# Altium PCB Unextended55.PcbDoc (part 2 of 2)
Units mm, origin at the board's own origin, x right, y up, seen from the top; angles counter-clockwise.
Board outline 275.2 x 94.2 mm, 2 copper layers (Component Side, Bottom Layer), stack 1.571 mm thick; 229 components, 125 nets, 706 pads, 180 vias.
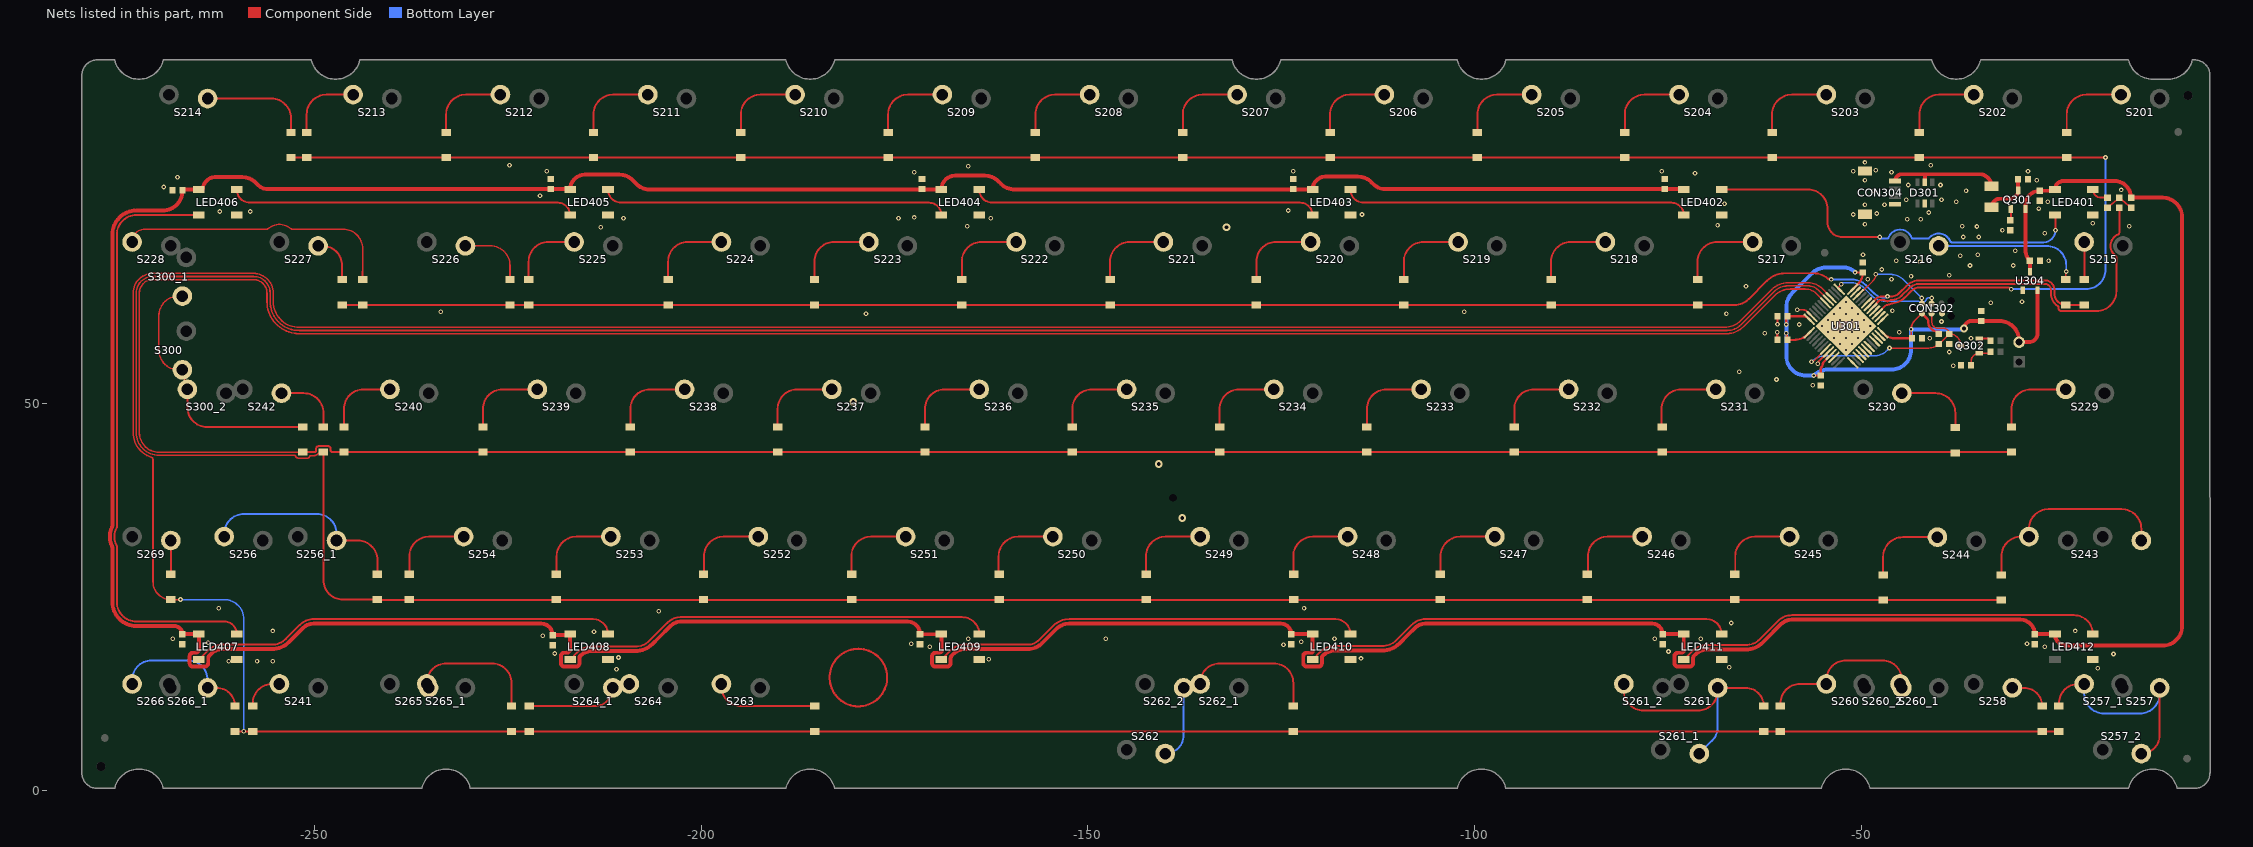
[diagram p2: the nets of this part, all layers, seen from the top]

## Via types
v1: diameter 0.6, hole 0.3, Component Side to Bottom Layer, tented both sides, 150 vias
v2: diameter 0.6, hole 0.3, Component Side to Bottom Layer, tented bottom, 25 vias
v3: diameter 1, hole 0.5, Component Side to Bottom Layer, tented both sides, 5 vias

## Nets (pads, with @x,y where several pads share a name; then routed paths per layer and width w, separated by ;. In a path a pad name is that pad's centre, name@x,y a point inside that pad or via, vN(x,y) a via of type N, cw(c..) or ccw(c..) an arc to the next point about the centre after c; other vN are vias at no path point) (continued)
GND: C301.1 C302.1 C303.1 C304.1 C305.1 C306.1 C307.1 C308.1 C310.2 C401.1 C402.1 C403.1 C404.1 C405.1 C406.1 C407.1 C408.1 C409.1 C410.1 C411.1 C412.1 CON302.5 CON304.4 CON304.5 D301.2 LED401.3 LED402.3 LED403.3 LED404.3 LED405.3 LED406.3 LED407.3 LED408.3 LED409.3 LED410.3 LED411.3 LED412.3 Q302.2 R304.2 R305.2 R307.2 U301.8 U301.23 U301.35 U301.47 U304.1 | length 44
  Component Side w0.254: v1(-58.293,62.103) -57.509,62.103 cw(c-57.509,61.49) -57.075,61.924 U301.47@-56.549,61.397 ; v1(-55.626,55.118) -55.56,55.184 -55.56,55.35 U301.8@-54.427,56.482 ; Q302.2@-34.741,58.389 -33.704,58.389 cw(c-33.705,58.135) -33.658,58.385 ccw(c-33.528,59.055) -33.528,58.372 R304.2@-33.289,58.074
  Component Side w0.279: -175.962,14.664 cw(c-179.68,14.54) -175.962,14.677
  Component Side w0.3: C305.1@-60.848,58.201 v1@-60.848,59.202 ; v1@-60.833,60.213 C304.1@-60.833,61.214
  Bottom Layer w0.254: v2(-55.081,60) v2(-54.303,59.222) v2(-53.526,58.444) v2(-52.748,57.666) v2(-51.97,56.889) ; v2(-52.748,62.333) v2(-51.192,60.778) v2(-49.637,59.222) ; v2(-51.97,63.111) v2(-51.192,62.333) v2(-50.414,61.556) v2(-49.637,60.778) v2(-48.859,60)
  other v1: -210.947,15.621 -19.431,15.748 -67.056,15.875 -261.112,16.637 -257.429,16.637 -255.397,16.637 -162.814,16.891 -114.681,17.018 -210.693,17.145 -17.392,17.597 -218.948,17.653 -74.93,17.907 -170.434,18.542 -26.289,18.542 -124.714,18.796 -172.847,18.923 -28.575,18.923 -263.779,19.05 -122.428,19.177 -268.351,19.558 -165.481,19.558 -147.701,19.558 -118.11,19.558 -76.708,19.558 -70.739,19.558 -220.472,19.939 -213.868,20.447 -255.397,20.574 -22.352,20.574 -66.802,21.59 -205.486,23.114 -262.382,23.495 -122.047,23.495 -56.261,52.324 -60.96,53.086 -65.786,54.102 -38.1,54.864 -38.608,56.642 -34.544,57.531 -41.148,58.42 -35.814,58.42 -62.484,59.055 -45.085,59.182 -60.848,59.194 -58.039,60.198 -60.833,60.221 -39.624,60.579 -178.689,61.595 -67.437,61.595 -233.68,61.864 -101.346,61.864 -45.974,61.976 -33.274,62.992 -29.21,63.119 -64.897,65.151 -49.149,66.04 -46.101,66.04 -43.561,66.421 -38.608,66.548 -47.371,67.31 -35.941,67.818 -30.353,67.818 -42.418,68.326 -45.466,68.453 -25.781,68.453 -37.211,69.088 -49.784,69.215 -34.925,69.215 -30.099,69.723 -36.83,71.501 -34.798,71.501 -26.289,72.009 -31.75,72.39 -212.979,72.771 -35.047,72.858 -165.608,72.898 -36.957,72.898 -15.367,72.898 -68.58,73.025 -49.53,73.152 -20.066,73.279 -44.069,73.787 -42.291,73.787 -210.058,73.914 -174.498,73.914 -162.56,73.914 -172.466,74.041 -114.554,74.422 -51.054,74.422 -48.006,74.549 -41.275,74.676 -262.255,74.803 -258.318,74.803 -124.079,74.93 -27.051,75.184 -49.53,75.692 -46.99,75.692 -117.094,75.819 -67.691,75.819 -37.719,76.073 -25.908,76.073 -44.196,76.327 -39.624,76.327 -220.853,76.835 -48.387,77.47 -36.449,77.47 -16.383,77.597 -269.494,77.978 -43.942,78.232 -39.751,78.232 -49.53,78.867 -27.305,78.867 -267.716,79.248 -71.501,79.756 -172.466,79.883 -46.101,79.883 -219.964,80.01 -123.444,80.01 -75.819,80.01 -51.054,80.01 -28.448,80.01 -48.133,80.137 -165.481,80.645 -224.79,80.772 -41.021,80.772 -49.53,81.153
  other v2: -51.192,57.666 -51.97,58.444 -50.414,58.444 -52.748,59.222 -51.192,59.222 -53.526,60 -51.97,60 -50.414,60 -54.303,60.778 -52.748,60.778 -53.526,61.556 -51.97,61.556
  other v3: -137.795,35.179 -140.843,42.164 -180.34,50.165 -132.08,72.771
LED: R308.2 U301.29 | length 48.6
  Component Side w0.254: U301.29@-48.452,62.457 -48.375,62.534 ccw(c-48.96,63.119) -48.267,62.667 cw(c-48.055,62.528) -48.236,62.706 -48.061,62.88 ccw(c-48.399,63.217) -47.988,62.976 cw(c-47.77,62.845) -47.95,63.024 -47.805,63.17 cw(c-47.319,62.686) -47.319,63.371 -47.132,63.371 cw(c-47.133,63.117) -46.983,63.322 ccw(c-46.609,63.825) -46.224,63.331 cw(c-46.069,63.13) -46.146,63.371 ccw(c-46.146,65.334) -46.143,63.371 ccw(c-46.146,65.334) -44.86,63.851 -44.848,63.862 ; -17.579,69.604 ccw(c-16.175,70.365) -17.121,69.078 ; R308.2@-16.637,75.296 -16.637,72.071 cw(c-16.891,72.072) -16.792,71.838 ccw(c-16.175,70.365) -17.121,69.078 cw(c-17.272,68.874) -17.018,68.875 -17.018,64.488 cw(c-19.558,64.488) -19.558,61.948 -23.558,61.948 -24.169,61.948 cw(c-24.169,62.275) -24.496,62.275 -24.496,62.379 ccw(c-24.75,62.378) -24.61,62.59 cw(c-23.558,64.19) -25.473,64.19 -25.473,64.643 ccw(c-26.289,64.643) -26.289,65.459 -42.382,65.459 ccw(c-42.382,63.373) -43.305,65.244 ccw(c-43.19,65.017) -43.345,65.218 -43.371,65.198 cw(c-43.526,65.399) -43.417,65.17 -43.507,65.127 ccw(c-43.398,64.898) -43.538,65.11 ccw(c-42.382,63.373) -43.858,64.847 -44.758,63.947 cw(c-46.146,65.334) -44.759,63.946 -44.802,63.902 cw(c-44.981,64.083) -44.815,63.891 -44.847,63.863 ; -44.847,63.863 ccw(c-44.681,63.671) -44.848,63.862
NetC306_2: C306.2 F301.1 Q301.3 | length 6.1
  Component Side w0.5: F301.1@-33.147,75.358 cw(c-32.051,75.358) -32.051,76.454 -30.791,76.454 ccw(c-30.791,77.527) Q301.3@-29.718,77.527 -29.718,78.994 C306.2@-29.733,78.994
NetC309_2: C309.2 Q302.1 R305.1 | length 3.8
  Component Side w0.203: R305.1@-35.799,54.899 -35.799,55.431 cw(c-34.741,55.431) Q302.1@-34.741,56.489 -33.477,56.489 ccw(c-33.477,56.677) C309.2@-33.289,56.677
NetD201_1: D201.1 S201.1 | length 10.8
  Component Side w0.254: D201.1@-23.431,85.05 -23.431,87.375 cw(c-20.892,87.375) -20.892,89.915 S201.1@-16.412,89.915
NetD202_1: D202.1 S202.1 | length 10.8
  Component Side w0.254: D202.1@-42.481,85.05 -42.481,87.375 cw(c-39.941,87.375) -39.941,89.915 S202.1@-35.462,89.915
NetD203_1: D203.1 S203.1 | length 10.8
  Component Side w0.254: D203.1@-61.531,85.05 -61.531,87.375 cw(c-58.991,87.375) -58.991,89.915 S203.1@-54.512,89.915
NetD204_1: D204.1 S204.1 | length 10.8
  Component Side w0.254: D204.1@-80.581,85.05 -80.581,87.375 cw(c-78.041,87.375) -78.041,89.915 S204.1@-73.562,89.915
NetD205_1: D205.1 S205.1 | length 10.8
  Component Side w0.254: D205.1@-99.632,85.05 -99.632,87.375 cw(c-97.091,87.375) -97.091,89.915 S205.1@-92.612,89.915
NetD206_1: D206.1 S206.1 | length 10.8
  Component Side w0.254: D206.1@-118.681,85.05 -118.681,87.375 cw(c-116.141,87.375) -116.141,89.915 S206.1@-111.662,89.915
NetD207_1: D207.1 S207.1 | length 10.8
  Component Side w0.254: D207.1@-137.731,85.05 -137.731,87.375 cw(c-135.191,87.375) -135.191,89.915 S207.1@-130.712,89.915
NetD208_1: D208.1 S208.1 | length 10.8
  Component Side w0.254: D208.1@-156.781,85.05 -156.781,87.375 cw(c-154.242,87.375) -154.242,89.915 S208.1@-149.762,89.915
NetD209_1: D209.1 S209.1 | length 10.8
  Component Side w0.254: D209.1@-175.832,85.05 -175.832,87.375 cw(c-173.291,87.375) -173.291,89.915 S209.1@-168.812,89.915
NetD210_1: D210.1 S210.1 | length 10.8
  Component Side w0.254: D210.1@-194.881,85.05 -194.881,87.375 cw(c-192.341,87.375) -192.341,89.915 S210.1@-187.862,89.915
NetD211_1: D211.1 S211.1 | length 10.8
  Component Side w0.254: D211.1@-213.931,85.05 -213.931,87.375 cw(c-211.391,87.375) -211.391,89.915 S211.1@-206.912,89.915
NetD212_1: D212.1 S212.1 | length 10.8
  Component Side w0.254: D212.1@-232.981,85.05 -232.981,87.375 cw(c-230.441,87.375) -230.441,89.915 S212.1@-225.962,89.915
NetD213_1: D213.1 S213.1 | length 9.8
  Component Side w0.254: D213.1@-251.016,85.05 -251.016,87.375 cw(c-248.475,87.375) -248.475,89.915 S213.1@-245.012,89.915
NetD214_1: D214.1 S214.1 | length 14.1
  Component Side w0.254: S214.1@-263.825,89.415 -255.587,89.415 cw(c-255.587,86.875) -253.047,86.875 D214.1@-253.047,85.05
NetD215_1: D215.1 S215.1 | length 4.9
  Component Side w0.254: S215.1@-21.175,70.865 cw(c-21.175,70.836) -21.145,70.836 D215.1@-21.145,66
NetD216_1: D216.1 S216.1 | length 19.8
  Component Side w0.254: D216.1@-23.558,66 -23.558,66.992 cw(c-23.495,66.992) v1(-23.495,67.056)
  Bottom Layer w0.254: S216.1@-39.987,70.365 -26.035,70.365 cw(c-26.035,67.825) -23.495,67.825 v1(-23.495,67.056)
NetD217_1: D217.1 S217.1 | length 10.9
  Component Side w0.254: D217.1@-71.162,66 -71.162,68.325 cw(c-68.622,68.325) -68.622,70.865 S217.1@-64.037,70.865
NetD218_1: D218.1 S218.1 | length 10.8
  Component Side w0.254: D218.1@-90.106,66 -90.106,68.325 cw(c-87.566,68.325) -87.566,70.865 S218.1@-83.087,70.865
NetD219_1: D219.1 S219.1 | length 10.8
  Component Side w0.254: D219.1@-109.156,66 -109.156,68.325 cw(c-106.617,68.325) -106.617,70.865 S219.1@-102.137,70.865
NetD220_1: D220.1 S220.1 | length 10.8
  Component Side w0.254: D220.1@-128.207,66 -128.207,68.325 cw(c-125.666,68.325) -125.666,70.865 S220.1@-121.187,70.865
NetD221_1: D221.1 S221.1 | length 10.7
  Component Side w0.254: D221.1@-147.13,66 -147.13,68.325 cw(c-144.589,68.325) -144.589,70.865 S221.1@-140.237,70.865
NetD222_1: D222.1 S222.1 | length 10.8
  Component Side w0.254: D222.1@-166.306,66 -166.306,68.325 cw(c-163.766,68.325) -163.766,70.865 S222.1@-159.287,70.865
NetD223_1: D223.1 S223.1 | length 10.8
  Component Side w0.254: D223.1@-185.356,66 -185.356,68.325 cw(c-182.816,68.325) -182.816,70.865 S223.1@-178.337,70.865
NetD224_1: D224.1 S224.1 | length 10.7
  Component Side w0.254: D224.1@-204.279,66 -204.279,68.325 cw(c-201.739,68.325) -201.739,70.865 S224.1@-197.387,70.865
NetD225_1: D225.1 S225.1 | length 9.7
  Component Side w0.254: D225.1@-222.314,66 -222.314,68.325 cw(c-219.773,68.325) -219.773,70.865 S225.1@-216.437,70.865
NetD226_1: D226.1 S226.1 | length 9
  Component Side w0.203: S226.1@-230.487,70.365 -227.266,70.365 cw(c-227.266,67.825) -224.726,67.825 D226.1@-224.726,66
NetD227_1: D227.1 S227.1 | length 5.8
  Component Side w0.254: S227.1@-248.983,70.365 cw(c-248.983,67.825) -246.444,67.825 D227.1@-246.444,66
NetD228_1: D228.1 S228.1 | length 36.5
  Component Side w0.203: S228.1@-273.587,70.865 cw(c-271.936,70.865) -271.936,72.517 -256.174,72.517 ccw(c-256.175,72.72) -256.042,72.567 cw(c-254.537,70.865) -253.033,72.567 ccw(c-252.9,72.72) -252.901,72.517 -246.316,72.517 cw(c-246.316,69.977) -243.776,69.977 -243.776,67.056
  Component Side w0.254: D228.1@-243.776,66 -243.776,67.056
NetD229_1: D229.1 S229.1 | length 10.8
  Component Side w0.254: D229.1@-30.575,46.95 -30.575,49.275 cw(c-28.035,49.275) -28.035,51.815 S229.1@-23.556,51.815
NetD230_1: D230.1 S230.1 | length 10.3
  Component Side w0.254: S230.1@-44.75,51.315 -40.386,51.315 cw(c-40.386,48.775) -37.846,48.775 D230.1@-37.846,46.847
NetD231_1: D231.1 S231.1 | length 10.8
  Component Side w0.254: D231.1@-75.819,46.95 -75.819,49.275 cw(c-73.279,49.275) -73.279,51.815 S231.1@-68.8,51.815
NetD232_1: D232.1 S232.1 | length 10.8
  Component Side w0.254: D232.1@-94.869,46.95 -94.869,49.275 cw(c-92.329,49.275) -92.329,51.815 S232.1@-87.85,51.815
NetD233_1: D233.1 S233.1 | length 10.8
  Component Side w0.254: D233.1@-113.919,46.95 -113.919,49.275 cw(c-111.379,49.275) -111.379,51.815 S233.1@-106.9,51.815
NetD234_1: D234.1 S234.1 | length 10.8
  Component Side w0.254: D234.1@-132.969,46.95 -132.969,49.275 cw(c-130.429,49.275) -130.429,51.815 S234.1@-125.95,51.815
NetD235_1: D235.1 S235.1 | length 10.8
  Component Side w0.254: D235.1@-152.019,46.95 -152.019,49.275 cw(c-149.479,49.275) -149.479,51.815 S235.1@-145,51.815
NetD236_1: D236.1 S236.1 | length 10.8
  Component Side w0.254: D236.1@-171.069,46.95 -171.069,49.275 cw(c-168.529,49.275) -168.529,51.815 S236.1@-164.05,51.815
NetD237_1: D237.1 S237.1 | length 10.8
  Component Side w0.254: D237.1@-190.119,46.95 -190.119,49.275 cw(c-187.579,49.275) -187.579,51.815 S237.1@-183.1,51.815
NetD238_1: D238.1 S238.1 | length 10.8
  Component Side w0.254: D238.1@-209.169,46.95 -209.169,49.275 cw(c-206.629,49.275) -206.629,51.815 S238.1@-202.15,51.815
NetD239_1: D239.1 S239.1 | length 10.8
  Component Side w0.254: D239.1@-228.219,46.95 -228.219,49.275 cw(c-225.679,49.275) -225.679,51.815 S239.1@-221.2,51.815
NetD240_1: D240.1 S240.1 | length 9.7
  Component Side w0.254: D240.1@-246.189,46.95 -246.189,49.275 cw(c-243.649,49.275) -243.649,51.815 S240.1@-240.25,51.815
NetD241_1: D241.1 S241.2 | length 5.2
  Component Side w0.254: D241.1@-258,10.85 -258,11.175 cw(c-255.46,11.175) -255.46,13.715 S241.2@-254.537,13.715
NetD242_1: D242.1 S242.1 | length 8.7
  Component Side w0.254: S242.1@-254.275,51.315 -251.397,51.315 cw(c-251.397,48.775) -248.856,48.775 D242.1@-248.856,46.95
NetD243_1: D243.1 S243.1 | length 27.4
  Component Side w0.254: D243.1@-31.877,27.829 -31.877,30.225 cw(c-29.337,30.225) -29.337,32.765 S243.1@-28.319,32.765 -28.319,33.782 cw(c-25.779,33.782) -25.779,36.322 -16.334,36.322 cw(c-16.334,33.782) -13.794,33.782 S243.1@-13.794,32.265
NetD244_1: D244.1 S244.2 | length 10.8
  Component Side w0.254: D244.1@-47.175,27.829 -47.175,30.154 cw(c-44.635,30.154) -44.635,32.694 S244.2@-40.156,32.694
NetD245_1: D245.1 S245.1 | length 10.8
  Component Side w0.254: D245.1@-66.294,27.9 -66.294,30.225 cw(c-63.754,30.225) -63.754,32.765 S245.1@-59.275,32.765
NetD246_1: D246.1 S246.1 | length 10.8
  Component Side w0.254: D246.1@-85.344,27.9 -85.344,30.225 cw(c-82.804,30.225) -82.804,32.765 S246.1@-78.325,32.765
NetD247_1: D247.1 S247.1 | length 10.8
  Component Side w0.254: D247.1@-104.394,27.9 -104.394,30.225 cw(c-101.854,30.225) -101.854,32.765 S247.1@-97.375,32.765
NetD248_1: D248.1 S248.1 | length 10.8
  Component Side w0.254: D248.1@-123.444,27.9 -123.444,30.225 cw(c-120.904,30.225) -120.904,32.765 S248.1@-116.425,32.765
NetD249_1: D249.1 S249.1 | length 10.8
  Component Side w0.254: D249.1@-142.494,27.9 -142.494,30.225 cw(c-139.954,30.225) -139.954,32.765 S249.1@-135.475,32.765
NetD250_1: D250.1 S250.1 | length 10.8
  Component Side w0.254: D250.1@-161.544,27.9 -161.544,30.225 cw(c-159.004,30.225) -159.004,32.765 S250.1@-154.525,32.765
NetD251_1: D251.1 S251.1 | length 10.8
  Component Side w0.254: D251.1@-180.594,27.9 -180.594,30.225 cw(c-178.054,30.225) -178.054,32.765 S251.1@-173.575,32.765
NetD252_1: D252.1 S252.1 | length 10.8
  Component Side w0.254: D252.1@-199.643,27.9 -199.643,30.225 cw(c-197.103,30.225) -197.103,32.765 S252.1@-192.624,32.765
NetD253_1: D253.1 S253.1 | length 10.8
  Component Side w0.254: D253.1@-218.694,27.9 -218.694,30.225 cw(c-216.154,30.225) -216.154,32.765 S253.1@-211.675,32.765
NetD254_1: D254.1 S254.1 | length 10.8
  Component Side w0.254: D254.1@-237.744,27.9 -237.744,30.225 cw(c-235.204,30.225) -235.204,32.765 S254.1@-230.725,32.765
NetD255_1: D255.1 S256.2 S256_1.2 | length 27.2
  Component Side w0.254: S256_1.2@-247.155,32.265 -244.411,32.265 cw(c-244.411,29.725) -241.871,29.725 D255.1@-241.871,27.9
  Bottom Layer w0.254: S256.2@-261.68,32.765 -261.68,33.147 cw(c-259.14,33.147) -259.14,35.687 -249.695,35.687 cw(c-249.695,33.147) -247.155,33.147 S256_1.2@-247.155,32.265
NetD256_1: D256.1 S269.1 | length 4.4
  Component Side w0.254: D256.1@-268.587,27.9 S269.1@-268.587,32.265
NetD257_1: D257.1 S257.2 S257_1.2 S257_2.2 | length 29.6
  Component Side w0.254: D257.1@-24.447,10.85 -24.447,11.175 cw(c-21.907,11.175) -21.907,13.715 S257_1.2@-21.175,13.715 ; S257_2.2@-13.794,4.715 ccw(c-13.794,7.096) -11.412,7.096 S257.2@-11.412,13.215
  Bottom Layer w0.254: S257_1.2@-21.175,13.715 -21.175,12.446 ccw(c-18.635,12.446) -18.635,9.906 -13.952,9.906 ccw(c-13.952,12.446) -11.412,12.446 S257.2@-11.412,13.215
NetD258_1: D258.1 S258.1 | length 5.2
  Component Side w0.254: S258.1@-30.462,13.215 -28.971,13.215 cw(c-28.971,10.85) D258.1@-26.607,10.85
NetD260_1: D260.1 S260.1 S260_1.1 S260_2.1 | length 21.9
  Component Side w0.254: D260.1@-60.452,10.85 -60.452,11.175 cw(c-57.912,11.175) -57.912,13.715 S260.1@-54.512,13.715 -54.512,14.224 cw(c-51.972,14.224) -51.972,16.764 -47.29,16.764 cw(c-47.29,14.224) -44.75,14.224 S260_2.1@-44.75,13.215
NetD261_1: D261.1 S261.1 S261_1.1 S261_2.1 | length 33
  Component Side w0.254: S261_2.1@-80.706,13.715 -80.706,12.827 ccw(c-78.166,12.827) -78.166,10.287 -71.102,10.287 ccw(c-71.102,12.827) -68.562,12.827 S261.1@-68.562,13.215 -64.976,13.215 cw(c-64.976,10.85) D261.1@-62.611,10.85
  Bottom Layer w0.254: S261_1.1@-70.944,4.715 -69.306,6.352 ccw(c-71.102,8.148) -68.562,8.148 S261.1@-68.562,13.215
NetD262_1: D262.1 S262.2 S262_1.2 S262_2.2 | length 27.9
  Component Side w0.254: S262_1.2@-135.475,13.715 -135.475,13.843 cw(c-132.935,13.843) -132.935,16.383 -125.984,16.383 cw(c-125.984,13.843) -123.444,13.843 D262.1@-123.444,10.85
  Bottom Layer w0.254: S262.2@-140,4.715 ccw(c-140,7.096) -137.619,7.096 S262_2.2@-137.619,13.215
NetD263_1: D263.1 S263.2 | length 13.9
  Component Side w0.254: S263.2@-197.387,13.715 -197.387,13.39 ccw(c-194.847,13.39) -194.847,10.85 D263.1@-185.293,10.85
NetD264_1: D264.1 S264.1 S264_1.1 | length 12.2
  Component Side w0.254: D264.1@-222.25,10.85 -213.802,10.85 ccw(c-213.802,13.215) S264_1.1@-211.437,13.215
NetD265_1: D265.1 S265.2 S265_1.2 | length 17
  Component Side w0.254: S265_1.2@-235.487,13.715 -235.487,13.843 cw(c-232.947,13.843) -232.947,16.383 -227.076,16.383 cw(c-227.076,13.843) -224.536,13.843 D265.1@-224.536,10.85
NetD266_1: D266.1 S266.1 S266_1.1 | length 19.1
  Component Side w0.254: S266_1.1@-263.825,13.215 -262.651,13.215 cw(c-262.651,10.85) D266.1@-260.286,10.85
  Bottom Layer w0.254: S266.1@-273.587,13.715 -273.587,14.224 cw(c-271.047,14.224) -271.047,16.764 -266.365,16.764 cw(c-266.365,14.224) -263.825,14.224 S266_1.1@-263.825,13.215
NetD300_1: D300.1 S300.1 S300_1.1 S300_2.1 | length 34.7
  Component Side w0.203: S300.1@-267.589,54.34 cw(c-267.589,56.88) -270.129,56.88 -270.129,61.325 cw(c-267.589,61.325) S300_1.1@-267.589,63.865 ; S300.1@-267.087,54.34 S300_2.1@-266.444,51.815
  Component Side w0.254: S300_2.1@-266.444,51.815 -266.444,49.49 ccw(c-263.904,49.49) -263.904,46.95 D300.1@-251.523,46.95
  Bottom Layer w0.203: S300.1@-267.589,54.34 S300.1@-267.087,54.34 ; S300_1.1@-267.589,63.865 S300_1.1@-267.087,63.865
NetLED401_2: LED401.2 LED402.4 | length 52.2
  Component Side w0.254: LED402.4@-68.049,77.65 -56.896,77.65 cw(c-56.896,75.11) -54.356,75.11 -54.356,73.403 ccw(c-52.454,73.403) -52.454,71.501 v1(-47.625,71.501) ; v1@-24.95,72.448 ccw(c-24.892,72.448) v1(-24.892,72.39) -24.892,74.293 ccw(c-24.95,74.293) LED401.2@-24.95,74.35
  Bottom Layer w0.254: v1(-47.625,71.501) -47.625,71.295 ccw(c-47.601,71.548) -47.602,71.294 -46.707,71.294 ccw(c-46.708,71.548) -46.472,71.453 cw(c-44.987,70.865) -43.501,71.45 ccw(c-43.266,71.544) -43.307,71.294 -41.41,71.294 ccw(c-41.411,71.548) -41.217,71.385 ; -41.216,71.385 cw(c-39.987,70.365) -40.805,71.737 cw(c-39.987,70.365) -38.511,70.975 ccw(c-38.277,71.073) -38.278,70.819 -26.463,70.819 ccw(c-26.463,72.39) v1(-24.892,72.39)
NetLED401_4: LED401.4 R401.2 | length 2.5
  Component Side w0.254: LED401.4@-20.05,77.65 ccw(c-18.995,77.65) -18.995,76.596 R401.2@-18.161,76.596
NetLED402_2: LED402.2 LED403.4 | length 45
  Component Side w0.254: LED403.4@-116.049,77.65 ccw(c-114.345,77.65) -114.345,75.946 -74.545,75.946 cw(c-74.545,74.35) LED402.2@-72.949,74.35
NetLED403_2: LED403.2 LED404.4 | length 45
  Component Side w0.254: LED404.4@-164.049,77.65 ccw(c-162.345,77.65) -162.345,75.946 -122.545,75.946 cw(c-122.545,74.35) LED403.2@-120.949,74.35
NetLED404_2: LED404.2 LED405.4 | length 45
  Component Side w0.254: LED405.4@-212.049,77.65 ccw(c-210.346,77.65) -210.346,75.946 -170.545,75.946 cw(c-170.545,74.35) LED404.2@-168.949,74.35
NetLED405_2: LED405.2 LED406.4 | length 45
  Component Side w0.254: LED406.4@-260.049,77.65 ccw(c-258.345,77.65) -258.345,75.946 -218.545,75.946 cw(c-218.545,74.35) LED405.2@-216.95,74.35
NetLED406_2: LED406.2 LED407.4 | length 78.1
  Component Side w0.254: LED406.2@-264.45,74.35 LED406.2@-264.949,74.35 -273.029,74.35 ccw(c-273.029,71.81) -275.569,71.81 -275.569,33.993 cw(c-275.823,33.995) -275.6,33.873 ccw(c-273.587,32.765) -275.6,31.657 cw(c-275.823,31.535) -275.569,31.537 -275.569,24.328 ccw(c-273.029,24.328) -273.029,21.788 -261.687,21.788 cw(c-261.687,20.15) LED407.4@-260.049,20.15
NetLED407_2: LED407.2 LED408.4 | length 55.9
  Component Side w0.254: LED407.2@-264.949,16.85 -263.747,18.052 cw(c-261.951,16.256) -261.951,18.796 -255.51,18.796 ccw(c-255.51,21.336) -253.714,19.54 -251.899,21.354 cw(c-250.103,19.558) -250.103,22.098 -213.997,22.098 cw(c-213.997,20.15) LED408.4@-212.049,20.15
NetLED408_2: LED408.2 LED409.4 | length 56.1
  Component Side w0.254: LED408.2@-216.95,16.85 -216.005,17.795 cw(c-214.209,15.999) -214.209,18.539 -212.219,18.539 cw(c-212.076,15.548) -212.076,18.542 -208.52,18.542 ccw(c-208.52,21.082) -206.724,19.286 -204.401,21.608 ; -204.401,21.609 cw(c-204.223,21.427) -204.375,21.631 -203.985,21.922 ; -203.985,21.922 cw(c-202.692,20.193) -202.692,22.352 -166.251,22.352 cw(c-166.251,20.15) LED409.4@-164.049,20.15
NetLED409_2: LED409.2 LED410.4 | length 55.9
  Component Side w0.254: LED409.2@-168.949,16.85 -167.747,18.052 cw(c-165.951,16.256) -165.951,18.796 -157.793,18.796 ccw(c-157.793,20.882) -156.953,18.973 ccw(c-157.793,20.882) -156.319,19.406 -155.648,20.077 -154.504,21.22 cw(c-152.386,19.104) -154.053,21.591 cw(c-152.386,19.104) -152.386,22.098 -117.997,22.098 cw(c-117.997,20.15) LED410.4@-116.049,20.15
NetLED410_2: LED410.2 LED411.4 | length 55.9
  Component Side w0.254: LED410.2@-120.949,16.85 -119.93,17.869 cw(c-118.134,16.073) -118.134,18.613 -111.929,18.613 ccw(c-111.929,21.153) -110.133,19.357 -108.135,21.354 cw(c-106.339,19.558) -106.339,22.098 -69.997,22.098 cw(c-69.997,20.15) LED411.4@-68.049,20.15
NetLED411_2: LED411.2 LED412.4 | length 56.4
  Component Side w0.254: LED411.2@-72.949,16.85 -71.803,17.996 cw(c-70.007,16.2) -70.007,18.74 -64.939,18.74 ccw(c-64.939,21.28) -63.143,19.484 -60.764,21.862 cw(c-58.968,20.066) -58.968,22.606 -22.505,22.606 cw(c-22.505,20.15) LED412.4@-20.05,20.15
NetQ301_1: Q301.1 R307.1 | length 1.5
  Component Side w0.254: R307.1@-30.734,73.675 ccw(c-30.893,73.834) -30.668,73.834 Q301.1@-30.668,75.127
NetR306_2: R306.2 R308.1 R401.1 | length 4
  Component Side w0.254: R401.1@-18.161,75.296 -17.863,75.569 -16.935,76.323 R308.1@-16.637,76.596 -16.339,76.323 -15.411,75.569 R306.2@-15.113,75.296
NRST: C310.1 CON302.3 Q302.3 R303.2 U301.7 | length 27.9
  Component Side w0.203: v1(-56.434,55.394) ccw(c-56.434,55.906) -56.312,55.409 ccw(c-56.434,55.906) -56.072,55.544 U301.7@-54.781,56.836 ; v1(-46.355,57.15) -41.28,57.15 ccw(c-41.28,58.953) R303.2@-40.005,57.678 ccw(c-40.005,57.912) -39.839,57.747 C310.1@-38.608,58.978 ; CON302.3@-40.894,61.63 -40.894,60.579 ccw(c-40.005,60.579) -40.005,59.69 -39.32,59.69 cw(c-39.32,58.978) C310.1@-38.608,58.978 ; Q302.3@-37.141,57.439 -37.141,57.511 ccw(c-38.608,57.511) C310.1@-38.608,58.978
  Bottom Layer w0.203: v1(-56.434,55.394) cw(c-54.648,53.608) -54.648,56.134 -48.423,56.134 ccw(c-48.423,58.674) -46.627,56.878 v1(-46.355,57.15)
PA0: U301.10
PA3: U301.13
PA5: U301.15
PA6: U301.16
PA7: U301.17
PA9: D215.2 D216.2 D217.2 D218.2 D219.2 D220.2 D221.2 D222.2 D223.2 D224.2 D225.2 D226.2 D227.2 D228.2 U301.30 | length 233.6
  Component Side w0.254: D227.2@-246.444,62.73 D228.2@-243.776,62.73 -66.364,62.73 ccw(c-66.364,65.27) -64.568,63.474 -62.206,65.836 cw(c-59.821,63.452) -62.204,65.837 cw(c-59.821,63.452) -60.314,66.787 ccw(c-60.35,67.039) -60.309,66.788 cw(c-59.886,64.284) -59.886,66.824 -56.198,66.824 cw(c-56.198,63.944) -54.331,66.136 cw(c-56.198,63.944) -54.263,66.076 ccw(c-54.093,66.265) -54.053,66.014 -53.91,66.037 cw(c-53.87,65.786) -53.87,66.04 v1@-53.848,66.04 ; U301.30@-48.806,62.811 -48.125,63.492 cw(c-47.319,62.686) -47.319,63.825 v1(-46.609,63.825) -46.146,63.825 ccw(c-46.146,65.334) -45.08,64.267 -44.178,65.169 cw(c-42.382,63.373) -42.382,65.913 -26.289,65.913 cw(c-26.289,64.643) -25.019,64.643 -25.019,64.19 ccw(c-23.558,64.19) D216.2@-23.558,62.73 ; D216.2@-24.058,62.977 ccw(c-23.804,62.984) -24.057,62.967 -24.042,62.967 D216.2@-23.558,62.73 ; D215.2@-21.145,62.73 D216.2@-23.558,62.73
  Bottom Layer w0.254: v1(-53.877,66.024) -52.697,66.024 ccw(c-52.698,66.278) -52.664,66.026 cw(c-52.578,65.405) -52.492,66.026 ccw(c-52.458,66.278) -52.459,66.024 -51.201,66.024 cw(c-51.201,63.484) -49.405,65.28 cw(c-51.201,63.484) -49.401,65.276 -48.708,64.583 cw(c-49.008,64.277) -48.704,64.579 -48.395,64.27 ccw(c-46.903,65.764) -48.339,64.216 ccw(c-46.903,65.764) -46.895,63.652 ccw(c-46.896,63.906) -46.769,63.686 ccw(c-46.99,64.068) -46.678,63.756 v1(-46.609,63.825)
PA10: U301.31
PB0: U301.18
PB1: U301.19
PB4: D241.2 D256.2 D257.2 D258.2 D260.2 D261.2 D262.2 D263.2 D264.2 D265.2 D266.2 U301.40 | length 532.9
  Component Side w0.203: -272.416,43.795 ccw(c-270.11,46.22) -271.122,43.03 ; v1(-267.335,24.63) D256.2@-268.587,24.63 cw(c-268.587,26.934) -270.891,26.934 -270.891,42.791 ccw(c-271.094,42.791) -271.01,42.976 -271.09,43.012 cw(c-271.006,43.197) -271.122,43.03 ; U301.40@-54.074,63.871 -55.047,64.845 ccw(c-56.843,63.049) -56.843,65.589 -59.487,65.589 ccw(c-59.487,62.645) -61.568,64.727 -65.611,60.684 cw(c-67.691,62.766) -67.691,59.823 -251.997,59.823 cw(c-251.997,63.17) -255.324,62.803 cw(c-251.997,63.17) -255.344,63.17 -255.344,64.262 ccw(c-257.884,64.262) -257.884,66.802 -270.916,66.802 ccw(c-270.916,64.262) -273.456,64.262 -273.456,46.22 ccw(c-270.11,46.22) -271.398,43.131 ccw(c-270.11,46.22) -271.122,43.03
  Component Side w0.254: D266.2@-260.286,7.58 v1(-259.144,7.58) D241.2@-258,7.58 -225.044,7.58 -219.583,7.58 -205.486,7.58 -200.533,7.58 -175.451,7.58 -161.544,7.58 -157.734,7.58 D262.2@-123.444,7.58 -99.695,7.58 D261.2@-62.611,7.58 D260.2@-60.452,7.58 D258.2@-26.607,7.58 D257.2@-24.447,7.58
  Bottom Layer w0.203: v1(-267.335,24.63) -261.683,24.63 cw(c-261.683,22.09) -259.144,22.09 v1(-259.144,7.58)
PB5: D242.2 D243.2 D244.2 D245.2 D246.2 D247.2 D248.2 D249.2 D250.2 D251.2 D252.2 D253.2 D254.2 D255.2 U301.41 | length 506.4
  Component Side w0.203: D242.2@-248.856,43.68 -249.365,43.567 ccw(c-249.365,43.364) -249.508,43.508 -249.557,43.459 cw(c-250.048,43.934) -250.048,43.251 -250.442,43.251 ccw(c-250.441,43.048) -250.631,43.12 cw(c-250.913,43.225) -250.913,42.923 -252.134,42.923 cw(c-252.134,43.225) -252.421,43.135 ccw(c-252.615,43.074) -252.614,43.277 -270.11,43.277 cw(c-270.11,46.22) -273.053,46.22 -273.053,64.262 cw(c-270.916,64.262) -270.916,66.399 -257.884,66.399 cw(c-257.884,64.262) -256.45,65.846 cw(c-257.884,64.262) -255.747,64.262 -255.747,63.17 ccw(c-251.997,63.17) -251.997,59.42 -67.357,59.42 ccw(c-67.357,61.96) -65.561,60.164 -61.283,64.441 cw(c-59.487,62.645) -59.487,65.185 -56.9,65.185 cw(c-56.9,63.242) -55.526,64.617 U301.41@-54.427,63.518
  Component Side w0.254: D242.2@-248.856,43.68 -248.856,27.17 ccw(c-246.316,27.17) -246.316,24.63 D255.2@-241.871,24.63 ccw(c-241.8,24.63) -241.8,24.559 D244.2@-47.175,24.559 D243.2@-31.877,24.559
PB6: D229.2 D230.2 D231.2 D232.2 D233.2 D234.2 D235.2 D236.2 D237.2 D238.2 D239.2 D240.2 D300.2 U301.42 | length 488.7
  Component Side w0.203: D300.2@-251.523,43.68 -270.11,43.68 cw(c-270.11,46.22) -272.65,46.22 -272.65,64.262 cw(c-270.916,64.262) -270.916,65.996 -257.884,65.996 cw(c-257.884,64.262) -256.489,65.291 cw(c-256.653,65.171) -256.463,65.243 -256.437,65.174 ccw(c-256.247,65.246) -256.39,65.102 -256.365,65.077 cw(c-256.509,64.933) -256.327,65.024 cw(c-257.884,64.262) -256.15,64.262 -256.15,63.17 ccw(c-251.997,63.17) -252.634,59.066 cw(c-252.664,58.865) -252.622,59.064 ccw(c-252.184,61.087) -252.184,59.017 -67.357,59.017 ccw(c-67.357,61.96) -65.277,59.878 -61.234,63.921 cw(c-59.153,61.839) -59.153,64.782 -57.223,64.782 cw(c-57.223,62.792) -55.816,64.2 U301.42@-54.781,63.164
  Component Side w0.254: D300.2@-251.523,43.68 -250.048,43.68 ccw(c-250.048,43.934) -249.794,43.934 -249.794,44.135 cw(c-249.467,44.135) -249.467,44.462 -248.246,44.462 cw(c-248.246,44.135) -247.919,44.135 -247.919,43.934 ccw(c-247.665,43.934) -247.665,43.68 D240.2@-246.189,43.68 D239.2@-228.219,43.68 D238.2@-209.169,43.68 D237.2@-190.119,43.68 D236.2@-171.069,43.68 D235.2@-152.019,43.68 D234.2@-132.969,43.68 D233.2@-113.919,43.68 D232.2@-94.869,43.68 D231.2@-75.755,43.68 -70.993,43.68 -56.388,43.68 D229.2@-30.575,43.68
PB10: U301.21
PB11: U301.22
PB12: U301.25
PB13: U301.26
PB14: D201.2 D202.2 D203.2 D204.2 D205.2 D206.2 D207.2 D208.2 D209.2 D210.2 D211.2 D212.2 D213.2 D214.2 U301.27 | length 281.1
  Component Side w0.254: D214.2@-253.047,81.78 D213.2@-251.016,81.78 D212.2@-232.981,81.78 D211.2@-213.931,81.78 D210.2@-194.881,81.78 D209.2@-175.832,81.78 D208.2@-156.781,81.78 D207.2@-137.731,81.78 D206.2@-118.681,81.78 D205.2@-99.632,81.78 D204.2@-80.581,81.78 D203.2@-61.531,81.78 D202.2@-42.481,81.78 D201.2@-23.431,81.78 v1(-18.415,81.78) ; U301.27@-47.745,61.75 -46.967,62.528 cw(c-45.847,61.408) -46.766,62.698 cw(c-46.62,62.49) -46.619,62.744 ccw(c-46.609,63.825) -46.076,62.885 cw(c-45.952,62.663) -45.953,62.917 ; -46.017,62.921 ccw(c-46.146,65.334) -44.562,63.509 ; -44.562,63.509 cw(c-44.392,63.32) -44.558,63.512 -44.55,63.52 ccw(c-44.847,63.863) -44.549,63.521 -44.518,63.547 ccw(c-44.981,64.083) -44.481,63.582 -44.403,63.66 -43.538,64.525 cw(c-42.382,63.373) -43.315,64.712 cw(c-43.17,64.503) -43.314,64.713 cw(c-43.17,64.503) -43.279,64.733 -43.267,64.738 -43.22,64.761 ccw(c-43.526,65.399) -43.103,64.831 cw(c-42.952,64.627) -43.059,64.858 cw(c-42.382,63.373) -42.382,65.005 -31.174,65.005 cw(c-31.174,64.203) v1(-30.607,64.77)
  Bottom Layer w0.254: v1(-30.607,64.77) -20.955,64.77 ccw(c-20.955,67.31) -18.415,67.31 v1(-18.415,81.78)
PB15: U301.28
RAW: CON304.1 D301.5 F301.2 | length 14.9
  Component Side w0.5: CON304.1@-45.625,78.75 cw(c-44.746,78.75) -44.746,79.629 -41.783,79.629 ; D301.5@-41.783,78.591 -41.783,79.629 ; F301.2@-33.147,78.058 ccw(c-34.718,78.058) -34.718,79.629 -41.783,79.629
SWCLK: CON302.4 U301.37 | length 14.1
  Component Side w0.203: U301.37@-53.013,64.932 -52.605,65.34 ccw(c-52.67,65.405) v1(-52.578,65.405) ; CON302.4@-40.894,62.9 v1(-40.894,63.627)
  Bottom Layer w0.203: v1@-52.451,65.532 cw(c-52.298,65.379) -52.298,65.595 -51.201,65.595 cw(c-51.201,63.484) -49.708,64.977 cw(c-51.201,63.484) -49.705,64.974 -49.009,64.278 cw(c-49.152,64.133) -49.008,64.277 -48.699,63.968 ccw(c-46.903,65.764) -46.903,63.224 -42.692,63.224 cw(c-42.693,63.021) -42.56,63.174 ccw(c-42.164,63.627) -41.582,63.474 cw(c-41.386,63.421) -41.419,63.621 cw(c-41.349,63.193) -41.349,63.627 v1(-40.894,63.627)
SWDIO: CON302.2 U301.34 | length 11.2
  Component Side w0.203: U301.34@-50.22,64.225 ccw(c-50.236,64.428) -50.093,64.283 -49.779,64.598 cw(c-49.46,64.278) -49.635,64.694 ccw(c-49.715,64.881) -49.6,64.713 -48.483,65.831 ccw(c-49.327,66.675) v1(-48.133,66.675) ; CON302.2@-42.164,62.9 v1(-42.164,63.627)
  Bottom Layer w0.203: v1(-48.133,66.675) -46.264,66.675 cw(c-46.264,64.135) -44.468,65.931 v1(-42.164,63.627)
VCC: C307.2 C401.2 C402.2 C403.2 C404.2 C405.2 C406.2 C407.2 C408.2 C409.2 C410.2 C411.2 C412.2 LED401.1 LED402.1 LED403.1 LED404.1 LED405.1 LED406.1 LED407.1 LED408.1 LED409.1 LED410.1 LED411.1 LED412.1 Q301.2 R306.1 U304.3 | length 667.5
  Component Side w0.5: LED406.1@-264.949,77.65 -264.949,77.653 -267.086,77.653 -267.086,77.467 cw(c-269.626,77.467) -269.626,74.927 -273.029,74.927 ccw(c-273.029,71.81) -276.146,71.81 -276.146,34.189 cw(c-276.646,34.19) -276.192,33.981 ccw(c-273.587,32.765) -276.192,31.55 cw(c-276.646,31.34) -276.146,31.341 -276.146,24.328 ccw(c-273.029,24.328) -273.029,21.211 -268.146,21.211 cw(c-268.146,20.152) C407.2@-267.086,20.152 -264.949,20.152 LED407.1@-264.949,20.15 -264.949,18.25 cw(c-265.449,18.25) -265.449,17.75 -265.699,17.75 ccw(c-265.699,17.3) -266.149,17.3 -266.149,16.4 ccw(c-265.699,16.4) -265.699,15.95 -264.199,15.95 ccw(c-264.199,16.4) -263.749,16.4 -263.749,17.027 cw(c-263.249,17.027) -263.745,17.091 cw(c-263.249,17.027) -263.612,17.371 cw(c-263.249,17.027) -263.603,17.38 -263.34,17.643 cw(c-261.951,16.256) -262.515,18.136 cw(c-261.951,16.256) -261.951,18.219 -255.51,18.219 ccw(c-255.51,21.336) -253.304,19.133 -251.491,20.946 cw(c-250.103,19.558) -250.103,21.521 -220.704,21.521 cw(c-220.704,20.025) C408.2@-219.207,20.025 -217.075,20.025 ccw(c-217.075,20.15) LED408.1@-216.95,20.15 -216.95,18.25 cw(c-217.449,18.25) -217.449,17.75 -217.7,17.75 ccw(c-217.7,17.3) -218.15,17.3 -218.15,16.4 ccw(c-217.7,16.4) -217.7,15.95 -216.199,15.95 ccw(c-216.199,16.4) -215.749,16.4 -215.749,17.027 cw(c-215.25,17.027) -215.603,17.381 -215.596,17.387 cw(c-214.209,15.999) -214.209,17.962 -212.219,17.962 ccw(c-212.219,18.539) -212.193,17.962 cw(c-212.076,15.548) -212.076,17.965 -208.52,17.965 ccw(c-208.52,21.082) -206.316,18.878 -205.497,19.696 -204.036,21.157 cw(c-203.683,20.804) -203.982,21.204 -203.639,21.461 cw(c-202.692,20.193) -202.692,21.775 -173.333,21.775 cw(c-173.333,20.152) C409.2@-171.709,20.152 ; LED406.1@-264.5,77.7 cw(c-264.5,77.65) -264.45,77.65 cw(c-262.852,77.65) -262.852,79.248 -259.37,79.248 cw(c-259.37,76.708) -257.574,78.504 -257.302,78.232 ccw(c-256.018,79.516) -256.018,77.7 LED405.1@-216.95,77.7 ; LED405.1@-216.95,77.65 cw(c-215.026,77.65) -215.212,79.564 cw(c-215.188,79.311) -215.176,79.565 ccw(c-215.138,80.391) -215.032,79.571 cw(c-214.999,79.319) -214.998,79.573 -210.608,79.573 cw(c-210.608,77.033) -208.993,78.994 cw(c-210.608,77.033) -208.812,78.829 -208.285,78.303 ccw(c-206.709,79.879) -206.709,77.65 -170.45,77.65 ; C409.2@-171.709,20.15 LED409.1@-168.949,20.15 -168.949,17.927 -168.95,17.926 cw(c-169.331,18.25) -169.331,17.75 -169.7,17.75 ccw(c-169.7,17.3) -170.149,17.3 -170.149,16.4 ccw(c-169.7,16.4) -169.7,15.95 -168.199,15.95 ccw(c-168.199,16.4) -167.749,16.4 -167.749,17.027 cw(c-167.25,17.027) -167.603,17.38 -167.55,17.434 -167.34,17.643 cw(c-165.951,16.256) -167.339,17.644 cw(c-165.951,16.256) -165.951,18.219 -157.793,18.219 ccw(c-157.793,20.882) -155.912,18.997 ; C404.2@-171.709,77.653 LED404.1@-168.949,77.653 ; LED404.1@-168.949,77.65 LED404.1@-168.949,77.653 ; -155.911,18.997 -155.457,19.452 -154.097,20.812 cw(c-152.386,19.104) -152.386,21.521 -125.073,21.521 cw(c-125.073,20.152) C410.2@-123.703,20.152 -120.949,20.152 LED410.1@-120.949,20.15 -120.949,17.841 cw(c-121.237,18.25) -120.953,17.839 cw(c-121.237,18.25) -121.237,17.75 -121.7,17.75 ccw(c-121.7,17.3) -122.149,17.3 -122.149,16.4 ccw(c-121.7,16.4) -121.7,15.95 -120.199,15.95 ccw(c-120.199,16.4) -119.749,16.4 -119.749,17.027 cw(c-119.249,17.027) -119.603,17.38 -119.522,17.461 cw(c-118.134,16.073) -118.134,18.036 -111.929,18.036 ccw(c-111.929,21.153) -109.723,18.95 -108.596,20.077 -107.728,20.945 cw(c-106.339,19.558) -106.339,21.521 -77.067,21.521 cw(c-77.067,20.152) C411.2@-75.697,20.152 -72.949,20.152 LED411.1@-72.949,20.15 -72.949,17.968 cw(c-73.362,18.25) -73.362,17.75 -73.699,17.75 ccw(c-73.699,17.3) -74.149,17.3 -74.149,16.4 ccw(c-73.699,16.4) -73.699,15.95 -72.199,15.95 ccw(c-72.199,16.4) -71.749,16.4 -71.749,17.027 cw(c-71.249,17.027) -71.603,17.38 -71.395,17.588 cw(c-70.007,16.2) -70.007,18.163 -64.939,18.163 ccw(c-64.939,21.28) -62.733,19.077 -62.551,19.26 -60.356,21.454 cw(c-58.968,20.066) -58.968,22.029 -29.443,22.029 cw(c-29.443,20.15) C412.2@-27.564,20.152 -24.95,20.152 LED412.1@-24.95,20.15 ccw(c-23.469,20.15) -23.469,18.669 -11.049,18.669 ccw(c-11.049,21.209) -8.509,21.209 -8.509,74.056 ccw(c-11.049,74.056) -11.049,76.596 R306.1@-15.113,76.596 ccw(c-17.257,76.596) -17.257,78.74 -23.86,78.74 ccw(c-23.86,77.65) LED401.1@-24.95,77.65 cw(c-25.115,77.65) -25.115,77.485 C401.2@-26.924,77.485 ccw(c-26.924,75.641) -28.768,75.641 Q301.2@-28.768,75.127 -28.768,69.803 ccw(c-26.859,69.803) C307.2@-28.209,68.453 cw(c-28.298,68.364) -28.172,68.364 U304.3@-28.172,67.028 ; LED402.1@-72.949,77.65 ccw(c-73,77.65) -73,77.7 -111.58,77.7 cw(c-111.58,79.759) -113.035,78.303 -113.308,78.575 ccw(c-115.104,76.779) -115.104,79.319 -119.28,79.319 ccw(c-119.28,77.65) LED403.1@-120.949,77.65 -159.463,77.65 cw(c-159.463,80.19) -161.259,78.394 -161.568,78.702 ccw(c-163.364,76.906) -163.364,79.446 -167.153,79.446 ccw(c-167.153,77.65) LED404.1@-168.949,77.653
VCC3V3: C301.2 C302.2 C303.2 C304.2 C305.2 C308.2 CON302.1 CON303.2 R303.1 U301.1 U301.9 U301.24 U301.36 U301.48 U304.2 | length 90.6
  Component Side w0.203: C301.2@-43.449,58.42 -43.561,58.532 v1(-43.561,59.563) cw(c-41.943,59.563) -43.087,60.707 CON302.1@-42.164,61.63
  Component Side w0.3: v1(-59.69,59.055) -59.633,58.998 -59.633,58.286 C305.2@-59.548,58.201 -58.71,58.201 ccw(c-58.71,60.741) -56.914,58.945 U301.1@-56.902,58.957 ; v1(-59.69,60.198) -59.69,61.107 cw(c-59.548,61.107) C304.2@-59.548,61.249 -57.4,61.249 cw(c-57.4,60.545) U301.48@-56.902,61.043 ; v1(-56.134,53.594) -56.127,53.601 -55.253,53.601 C302.2@-55.245,53.609 -55.245,54.41 cw(c-54.632,54.41) -55.237,54.51 cw(c-54.941,54.46) -55.158,54.667 ccw(c-55.626,55.118) -55.11,54.723 ccw(c-55.626,55.118) -54.982,55.031 ccw(c-55.626,55.118) -54.976,55.108 cw(c-54.676,55.102) -54.889,55.313 U301.9@-54.074,56.129 ; U301.36@-50.927,64.932 -50.377,65.482 ccw(c-51.809,66.914) C303.2@-49.784,66.914 -50.8,66.914 v1(-50.8,66.929) ; U301.24@-47.038,58.957 ccw(c-45.741,60.253) -45.741,58.42 C301.2@-43.449,58.42 ; CON302.1@-42.164,61.63 -41.51,60.976 cw(c-41.907,60.579) -41.461,60.92 cw(c-41.907,60.579) -41.346,60.579 ccw(c-40.005,60.579) -41.204,59.979 ccw(c-40.005,60.579) -40.005,59.238 R303.1@-39.878,59.238
  Component Side w0.5: v3(-36.703,59.69) cw(c-35.752,59.69) -35.925,60.625 cw(c-35.752,59.69) -35.752,60.641 C308.2@-34.487,60.641 -32.131,60.641 cw(c-32.131,58.101) -29.591,58.101 CON303.2@-29.591,57.912 -28.318,57.912 ccw(c-28.318,59.008) -27.222,59.008 U304.2@-27.222,64.628
  Bottom Layer w0.5: v1(-50.8,66.929) -50.896,67.025 ccw(c-52.197,65.724) -52.197,67.564 -54.574,67.564 ccw(c-54.574,65.024) -56.37,66.82 -58.946,64.244 ccw(c-57.15,62.448) -59.69,62.448 v1(-59.69,60.198) v1(-59.69,59.055) -59.69,56.134 ccw(c-57.15,56.134) -57.15,53.594 v1(-56.134,53.594) -56.104,53.624 cw(c-54.308,51.828) -54.308,54.368 -46.101,54.368 ccw(c-46.101,56.908) -43.561,56.908 v1(-43.561,59.563) -36.965,59.563 -36.838,59.69 v3(-36.703,59.69)
pads on no net: CON302.0 CON302.6 D301.3 D301.4 Designator31. Designator31.1 Designator31.2 Designator32. Designator32.1 Designator32.2 Designator33. Designator33.1 Designator33.2 Designator34. Designator34.1 Designator34.2 Designator34_1. Designator34_1.1 Designator34_1.2 Designator34_1_1. Designator34_1_1.1 Designator34_1_1.2 Designator35. Designator35.1 Designator35.2 Designator35_1. Designator35_1.1 Designator35_1.2 Designator35_2. Designator35_2.1 Designator35_2.2 Designator35_2_1. Designator35_2_1.1 Designator35_2_1.2 Designator35_3. Designator35_3.1 Designator35_3.2 Designator35_3_1. Designator35_3_1.1 Designator35_3_1.2 Designator35_4. Designator35_4.1 Designator35_4.2 Designator35_5. Designator35_5.1 Designator35_5.2 Designator35_6. Designator35_6.1 Designator35_6.2 Designator35_7. Designator35_7.1 Designator35_7.2 Designator36. Designator36.1 Designator36.2 Designator36_1. Designator36_1.1 Designator36_1.2 Designator36_2. Designator36_2.1 Designator36_2.2 Designator36_3. Designator36_3.1 Designator36_3.2 Designator36_3_1. Designator36_3_1.1 Designator36_3_1.2 Designator36_4. Designator36_4.1 Designator36_4.2 Designator36_4_1. Designator36_4_1.1 Designator36_4_1.2 Designator37. Designator37.1 Designator37.2 Designator38. Designator38.1 Designator38.2 Designator39. Designator39.1 Designator39.2 Designator40. Designator40.1 Designator40.2 Designator41. Designator41.1 Designator41.2 FID1.0 FID2.0 FID3.0 FID4.0 LED412.2 S201. S202. S203. S204. S205. S206. S207. S208. S209. S210. S211. S212. S213. S214. S215. S216. S217. S218. S219. S220. S221. S222. S223. S224. S225. S226. S227. S228. S229. S230. S231. S232. S233. S234. S235. S236. S237. S238. S239. S240. S241. S242. S243. S244. S245. S246. S247. S248. S249. S250. S251. S252. S253. S254. S256. S256_1. S257. S257_1. S257_2. S258. S260. S260_1. S260_2. S261. S261_1. S261_2. S262. S262_1. S262_2. S263. S264. S264_1. S265. S265_1. S266. S266_1. S269. S300. S300_1. S300_2.

## Polygon pours and split planes (outlines as drawn)
GND on Bottom Layer "Component Side-No Net" (hatched 45Degree grid 1.397 track 0.203, remove dead copper, pour order 0): -0.635,93.995 -0.635,0.65 -284.607,0.65 -284.607,93.995
GND on Component Side "Component Side-No Net" (hatched 45Degree grid 1.397 track 0.203, remove dead copper, pour order 1): -0.635,93.995 -0.635,0.65 -284.607,0.65 -284.607,93.995

## Other copper
Component Side:
  region net GND: 1746 vertices and 2 holes, not listed, extent -182.698,11.409 -176.786,17.549

## Silkscreen, mask and mechanical layers (free items; w line width, h text height)
Top Overlay:
  text "RESET" at -31.242,59.69 h0.75
Top Solder:
  drawing of 2 lines, arcs and shapes, not listed
outline:
  the board outline again, w0.1
Mechanical 2:
  circle w1: c-18.675,9.215 r1.501
  circle w1: c-47.25,9.215 r1.501
  circle w1: c-142.5,9.215 r1.501
  circle w1: c-237.75,9.215 r1.501
  circle w1: c-266.325,9.215 r1.501
  lines w0.5: -271.087,9.215 -266.324,9.215 -252.037,9.215 -237.75,9.215 -223.463,9.215 -142.5,9.215 -61.538,9.215 -47.25,9.215 -32.963,9.215 -18.675,9.215
  text "NEXT" at -218.409,2.449 h1.52
  text "NEXT" at -205.105,-187.071 h1.52
Mechanical 3:
  circle w1: c-13.912,9.215 r1.501
  circle w1: c-32.962,9.215 r1.501
  circle w1: c-52.012,9.215 r1.501
  circle w1: c-78.206,9.215 r1.501
  circle w1: c-140.119,9.215 r1.501
  circle w1: c-194.887,9.215 r1.501
  circle w1: c-213.937,9.215 r1.501
  circle w1: c-232.987,9.215 r1.501
  circle w1: c-252.037,9.215 r1.501
  circle w1: c-271.087,9.215 r1.501
  lines w0.5: -271.087,9.215 -261.562,9.215 -252.037,9.215 -242.512,9.215 -232.987,9.215 -223.462,9.215 -213.937,9.215 -204.412,9.215 -194.887,9.215 -185.362,9.215 -140.119,9.215 -94.875,9.215 -78.206,9.215 -61.537,9.215 -52.012,9.215 -42.487,9.215 -32.962,9.215 -23.437,9.215 -13.912,9.215
  text "M0116" at -123.317,3.429 h1.52
  text "Seems to have support for both center and off-center space" at -161.029,-156.21 h1.52
  text "M0116" at -174.879,-156.464 h1.52
Mechanical 4:
  circle w1: c-16.294,9.215 r1.501
  circle w1: c-42.487,9.215 r1.501
  circle w1: c-73.444,9.215 r1.501
  circle w1: c-140.119,9.215 r1.501
  circle w1: c-206.794,9.215 r1.501
  circle w1: c-232.987,9.215 r1.501
  circle w1: c-252.037,9.215 r1.501
  circle w1: c-271.087,9.215 r1.501
  lines w0.5: -271.087,9.215 -261.562,9.215 -252.037,9.215 -242.512,9.215 -232.987,9.215 -223.462,9.215 -206.794,9.215 -190.125,9.215 -140.119,9.215 -90.112,9.215 -73.444,9.215 -56.775,9.215 -42.487,9.215 -30.581,9.215 -16.294,9.215
  text "M0118" at -131.064,5.08 h1.52
  text "M0118" at -152.781,-125.984 h1.52
Mechanical 7:
  circle w1: c-252.037,9.215 r1.501
  circle w1: c-232.987,9.215 r1.501
  circle w1: c-213.937,9.215 r1.501
  circle w1: c-194.887,9.215 r1.501
  circle w1: c-271.087,9.215 r1.501
  circle w1: c-132.975,9.215 r1.501
  circle w1: c-71.062,9.215 r1.501
  circle w1: c-52.012,9.215 r1.501
  circle w1: c-32.962,9.215 r1.501
  circle w1: c-13.912,9.215 r1.501
  lines w0.5: -271.087,9.215 -261.562,9.215 -252.037,9.215 -242.512,9.215 -232.987,9.215 -223.462,9.215 -213.937,9.215 -204.412,9.215 -194.887,9.215 -132.975,9.215 ; -71.062,9.215 -61.537,9.215 -52.012,9.215 -42.487,9.215 -32.962,9.215 -23.437,9.215 -13.912,9.215
  text "Add offset stem! / 5.5U" at -111.88,5.461 h1.52
  text "iic" at -217.678,3.302 h1.52
  text "Seems to have support for both center and off-center space" at -157.727,-83.947 h1.52
  text "iic" at -169.291,-93.599 h1.52
Mechanical 14:
  lines w0.5: -271.087,9.215 -271.087,28.265 ; -235.739,-186.651 -221.451,-186.651 ; -215.9,-181.132 -134.937,-181.132 ; -181.737,-160.177 -136.493,-160.177 ; -171.45,-88.392 -119.062,-88.392 ; -161.036,-129.189 -111.03,-129.189 ; -80.732,-154.051 -64.063,-154.051 ; -74.89,-121.602 -58.221,-121.602 ; -44.323,-121.031 -30.035,-121.031 ; -18.675,66.365 -13.912,66.365 ; -18.161,-121.539 -6.255,-121.539 ; -16.55,-153.924 -7.025,-153.924 ; -13.912,9.215 -13.912,28.265 -13.912,47.315 -13.912,66.365 ; -13.912,85.415 -13.912,66.365
  text "Enter keys neet to be investigated" at -341.884,55.626 h1.52
  text "Fix bottom row!" at -313.055,8.89 h1.52
Mechanical 16:
  drawing of 548 lines, arcs and shapes, not listed